# Altium PCB PCB1.PcbDoc
Units mm, origin at the board's own origin, x right, y up, seen from the top; angles counter-clockwise.
Board outline 41.58 x 30 mm, 2 copper layers (Top Layer, Bottom Layer); 19 components, 11 nets, 51 pads, 8 vias.
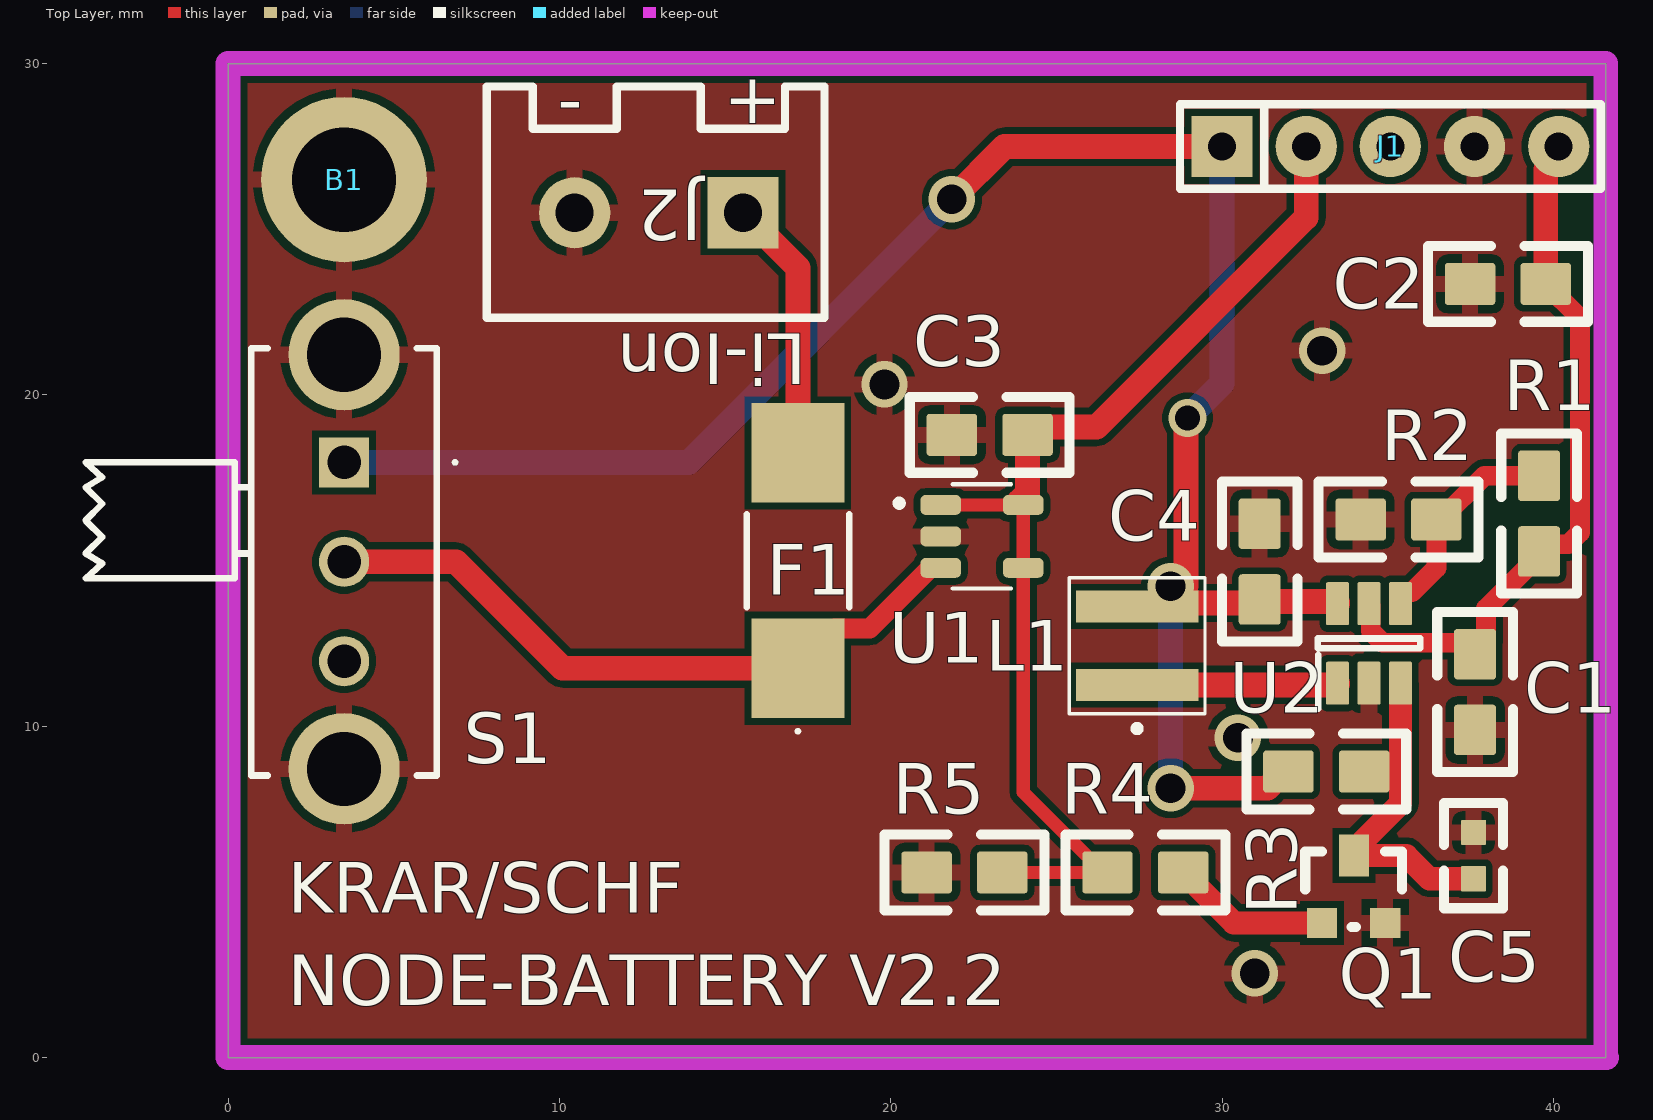
[diagram p0: Top Layer view]
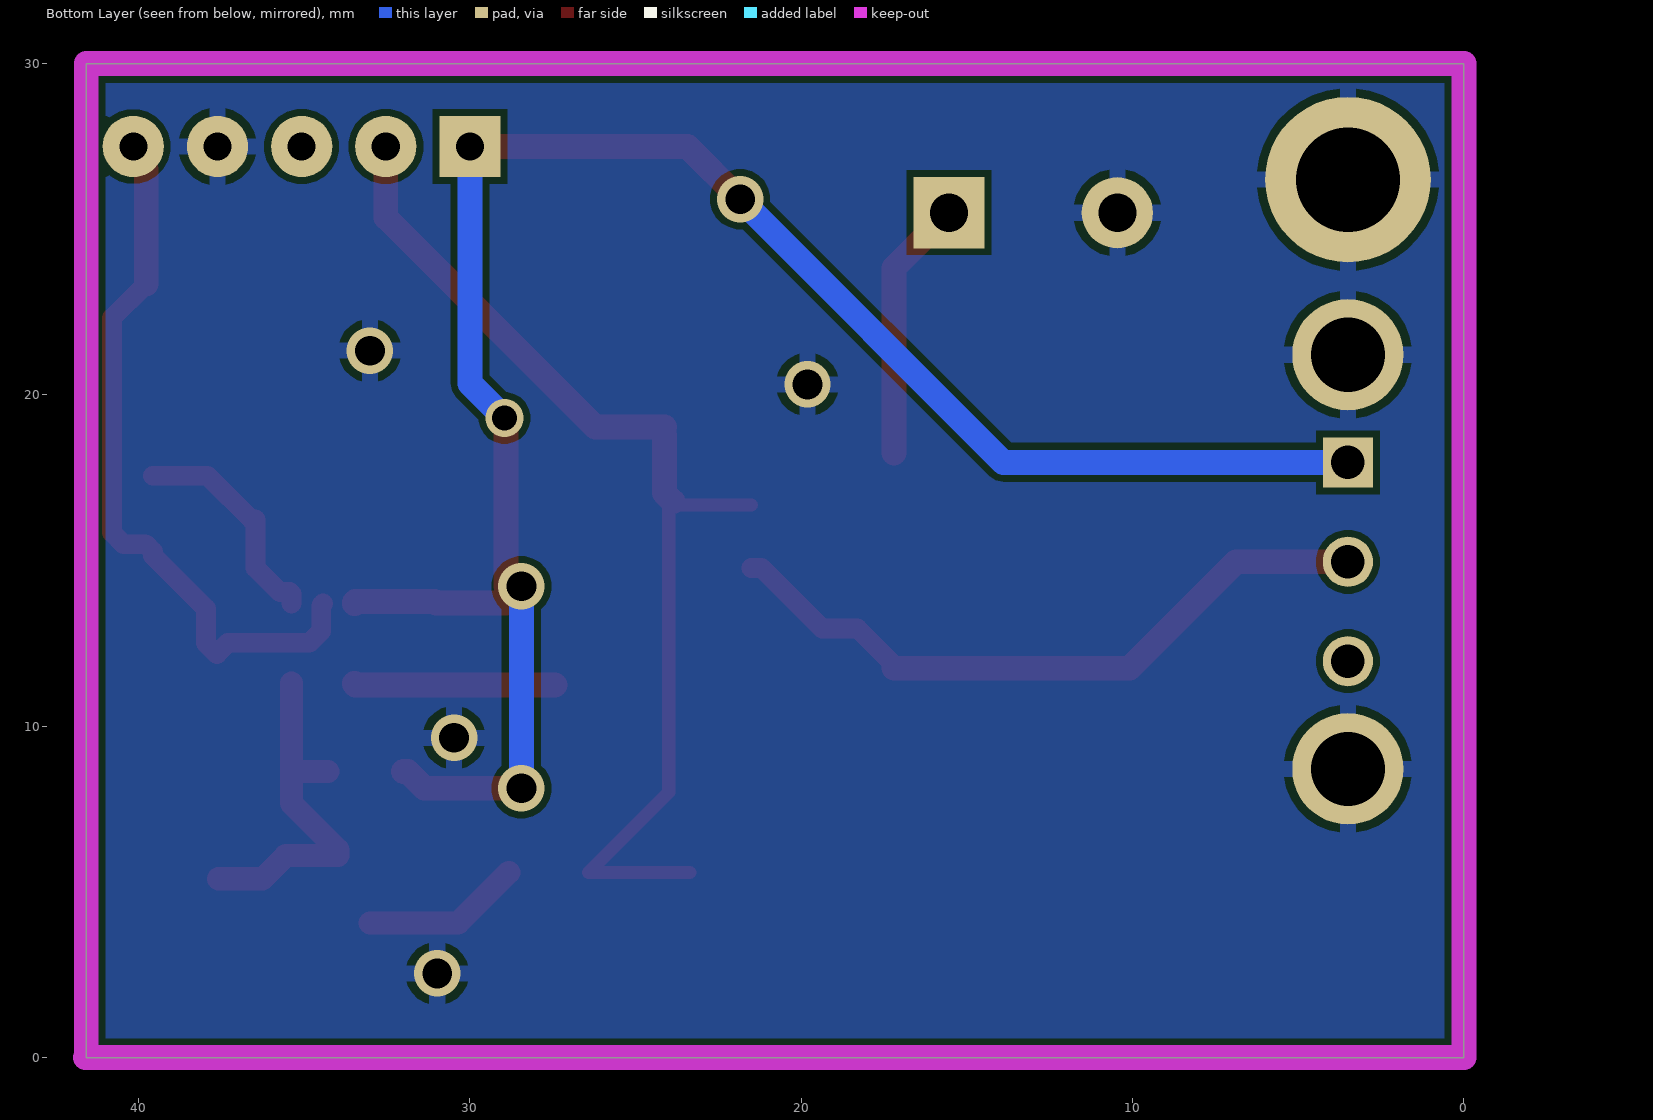
[diagram p1: Bottom Layer view, seen from below]

## Layer stack, top to bottom
Top Solder: solder mask 0.0102, Solder Resist, Dk 3.5
Top Layer: signal copper 0.0356
Dielectric 1: dielectric 0.32, FR-4, Dk 4.8
Bottom Layer: signal copper 0.0356
Bottom Solder: solder mask 0.0102, Solder Resist, Dk 3.5

## Board outline
0,0 41.58,0 41.58,30 0,30

## Design rules (kind name [scope] priority, off if disabled: settings)
Clearance [All] p1: gap=0.2 ignorepadtopadclearanceinfootprint=FALSE except(0.1: Arc-Arc Arc-Track Arc-SMDPad Arc-THPad Arc-Via Arc-Text Arc-Hole Track-Track Track-SMDPad Track-THPad Track-Via Track-Text Track-Hole SMDPad-SMDPad SMDPad-THPad SMDPad-Via SMDPad-Text SMDPad-Hole THPad-THPad THPad-Via THPad-Text THPad-Hole Via-Via Via-Text Via-Hole Text-Text Text-Hole)
HoleSize [All] p1: absolutevalues=TRUE maxlimit=6 minlimit=0.2 maxpercent=80.000 minpercent=20.000
MinimumAnnularRing [All] p1: minimumring=0.2
MinimumSolderMaskSliver [All] p1: minsoldermaskwidth=0
PolygonConnect [All] p1: connectstyle=Relief reliefconductorwidth=0.5 reliefentries=4 polygonreliefangle="90 Angle" airgapwidth=0.25
RoutingVias [All] p1: holewidth=0.85 width=0.85 viastyle="Through Hole" minholewidth=0.75 minwidth=0.2 maxholewidth=0.95 maxwidth=1.95
SilkToSilkClearance [All] p1: silktosilkclearance=0
SilkToSolderMaskClearance [IsPad] p1: minsilkscreentomaskgap=0 clearancetoexposedcopper=TRUE
SolderMaskExpansion [All] p1: expansion=0.102 istentingtop=FALSE
Width [All] p1: maxlimit=6 minlimit=0.2 preferedwidth=0.75
26 further rules are at their usual default settings.

## Components (designator, comment, footprint, x,y, rotation, side; value= is the part's Value field where it differs from the comment)
B1 "Schraube" "B_Schraube-M3 PAD" 3.5,26.5 r0 top
C1 "10µF" C_SMD_0805 37.638,11.033 r270 top
C2 "1µF" C_SMD_0805 38.629,23.352 r180 top
C3 "1µF" C_SMD_0805 22.987,18.796 r180 top
C4 "10µF" C_SMD_0805 31.136,14.97 r90 top
C5 "100nF" C_SMD_0603 37.592,6.096 r90 top
F1 "1A" F_OMF63_Schurtner 17.2,15 r90 top
J1 "BATTERY-COM" SIP-5 35.08,27.5 r0 top
J2 "Batterie | Lithium-Ion" "J_THT_Printklemme 2x" 13,25.5 r180 top
L1 "2,2uH" L_SMD_74438357100 27.437,12.43 r90 top
Q1 "BC846" SOT-23-3_BC846 33.02,4.064 r0 top
R1 "1M" R_SMD_0805 39.569,16.418 r270 top
R2 "100k" R_SMD_0805 35.327,16.24 r0 top
R3 ">100k" R_SMD_0805 33.147,8.636 r0 top
R4 "1k" R_SMD_0805 27.686,5.588 r0 top
R5 "47k" R_SMD_0805 22.225,5.588 r0 top
S1 "S_SLW-1298856-5A-RA-N-D" SLW12988565ARAND 3.5,17.964 r270 top
U1 "U_MCP73811T-420I/OT" SOT95P280X145-5N 22.754,15.732 r0 top
U2 "U_TLV61070ADBVR" SOT23-6 33.488,13.7 r90 top

## Footprints (in the part's own frame and the unit in brackets; to place one, negate y for a bottom-side part, rotate by r counter-clockwise, add the part's x,y. Pads: shape width x height; smd on the part's side, far side on the other; paste and mask are expansions set on the pad)
"B_Schraube-M3 PAD" [mm] "LB-2024-04-18"
  round 5 hole 3.15 unplated: 1(0,0)
C_SMD_0603 [mil] "LB-2024-04-17"
  rrect10% 30x30 smd paste-0.79 mask+1.97: 1(-27.5,0) 2(27.5,0)
  silkscreen extent -62,-35 62,35
C_SMD_0805 [mil] "LB-2024-04-17"
  rrect15% 60x50 smd paste-0.79 mask+1.97: 1(-45,0) 2(45,0)
  silkscreen extent -95,-45 95,45
F_OMF63_Schurtner [mm]
  rect 3x2.8 smd: 1(-3.25,0) 2(3.25,0)
  silkscreen extent -5.2,-1.55 1.4,1.55
"J_THT_Printklemme 2x" [mm] "LB-2024-04-17"
  rect 2.15x2.15 hole 1.15: 1(-2.54,0)
  round 2.15 hole 1.15: 2(2.54,0)
  silkscreen extent -5,-3.81 5.19,3.18
L_SMD_74438357100 [mm]
  rect 0.97x3.7 smd: 1(-1.18,0) 2(1.18,0)
  silkscreen extent -2.6,-2.05 2.05,2.05
R_SMD_0805 [mil] "LB-2024-04-17"
  rrect15% 60x50 smd paste-0.79 mask+1.97: 1(-45,0) 2(45,0)
  silkscreen extent -95,-45 95,45
SIP-5 [mm] "LB-2024-04-17"
  rect 1.85x1.85 hole 0.85: 1(-5.08,0)
  round 1.85 hole 0.85: 2(-2.54,0) 3(0,0) 4(2.54,0) 5(5.08,0)
  silkscreen extent -6.35,-1.27 6.35,1.27
SLW12988565ARAND [mm]
  rect 1.515x1.515 hole 1.01: 1(0,0)
  round 1.515 hole 1.01: 2(3,0) 3(6,0)
  round 3.36 hole 2.24: 4(-3.25,0) 5(9.25,0)
  silkscreen extent -3.45,-7.8 9.45,3.4
SOT23-6 [mm] "LB-2024-04-25"
  rrect15% 1.3x0.7 smd paste-0.02 mask+0.05: 1(-2.4,0) 2(-2.4,-0.95) 3(-2.4,-1.9) 4(0,-1.9) 5(0,-0.95) 6(0,0)
  silkscreen extent -3.17,-2.5 -1.05,0.6
SOT95P280X145-5N [mm]
  rrect50% 1.22x0.6 smd: 1(-1.245,0.95) 2(-1.245,0) 3(-1.245,-0.95) 4(1.245,-0.95) 5(1.245,0.95)
  silkscreen extent -2.6,-1.57 0.88,1.57, body extent -1.45,-1.35 1.45,1.35, height 1.45
SOT-23-3_BC846 [mil] "SMD Footprint für BC846"
  rect 36x36 smd: B(0,0) E(75,0)
  rect 36x50 smd: C(38,80)
  silkscreen extent -20,-5 95,85

## Part data
B1: library part B_Schraube, "Schraubenloch für M3 Schrauben"
C1 C2 C3 C4 C5: library part C_SMD_KO, "Kondensator SMD Universal, Keramik, Folie, usw."
F1: library part F_THT_Fuse, "Sicherung"
J1: library part J_THT_CON5, "Stecker"
J2: library part J_THT_CON2, "Stecker"
L1: library part L_SMD_Spule, "Spule SMD"
Q1: library part Q_SMD_NPN, "NPN Transistor"
R1 R2 R3 R4 R5: library part R_SMD_Widerstand, "Widerstand SMD"
S1: "Switch", Manufacturer_Name="Same Sky", Manufacturer_Part_Number=SLW-1298856-5A-RA-N-D, Datasheet Link=https://www.sameskydevices.com/product/resource/slw-1298856-5a-ra-n-d.pdf, Height=6.3mm
U1: "Charger IC Lithium Ion/Polymer SOT-23-5", Package="SOT-23 Microchip", Availability="In Stock", Check_prices=https://www.snapeda.com/parts/MCP73811T-420I/OT/Microchip/view-part/?ref=eda, MF=Microchip, MP=MCP73811T-420I/OT, Price=None, Purchase-URL=https://pricing.snapeda.com/search/part/MCP73811T-420I/OT/?ref=eda, SnapEDA_Link=https://www.snapeda.com/parts/MCP73811T-420I/OT/Microchip/view-part/?ref=snap
U2: "Integrated Circuit, Boost converter: Input 0.5 - 5.5V  / Output 2.2 - 5.5V", Arrow Part Number=TLV61070ADBVR, Manufacturer_Name="Texas Instruments", Mouser Part Number=595-TLV61070ADBVR, Arrow Price/Stock=https://www.arrow.com/en/products/tlv61070adbvr/texas-instruments?region=europe, Datasheet Link=https://www.ti.com/lit/ds/symlink/tlv61070a.pdf?HQS=dis-mous-null-mousermode-dsf-pf-null-wwe&ts=1668211309833&ref_url=https%253A%252F%252Fwww.mouser.com%252F, Height=1.45mm, Manufacturer_Part_Number=TLV61070ADBVR, Mouser Price/Stock=https://www.mouser.co.uk/ProductDetail/Texas-Instruments/TLV61070ADBVR?qs=T%252BzbugeAwjhLlT1empixsw%3D%3D

## Via types
v1: diameter 1.4, hole 0.9, Top Layer to Bottom Layer, 7 vias
v2: diameter 1.15, hole 0.75, Top Layer to Bottom Layer, 1 vias

## Nets (pads, with @x,y where several pads share a name; then routed paths per layer and width w, separated by ;. In a path a pad name is that pad's centre, name@x,y a point inside that pad or via, vN(x,y) a via of type N, cw(c..) or ccw(c..) an arc to the next point about the centre after c; other vN are vias at no path point)
3,3V: J1.3
5V: C1.1 C2.1 J1.5 R1.2 U2.5 | length 21.9
  Top Layer w0.6: U2.5 34.488,13.65 34.488,12.874 34.84,12.522 37.303,12.522 37.638,12.187 C1.1 37.973,12.511 37.973,13.552 39.569,15.148 R1.2 39.788,15.494 40.454,15.494 40.805,15.845 40.805,22.319 C2.1
  Top Layer w0.75: C2.1 39.772,26.815 40.16,27.202 J1.5
GND: B1.1 C1.2 C2.2 C3.2 C4.2 C5.2 J1.4 J2.2 Q1.E R2.1 R5.1 S1.4 S1.5 U1.2 U2.2
  other v1: 30.988,2.54 30.48,9.652 19.812,20.32 33.02,21.336
NetC5_1: C5.1 Q1.C R3.2 U2.3 | length 10.8
  Top Layer w0.7: R3.2 35.388,8.636 ; U2.3 35.388,8.636 ; C5.1 36.258,5.398 35.56,6.096 Q1.C 33.985,6.274 35.388,7.677 35.388,8.636
NetF1_2: F1.2 J2.1 | length 8.6
  Top Layer w0.5: J2.1 J2.1@16.04,26
  Top Layer w0.75: J2.1 17.2,23.84 F1.2
NetL1_1: L1.1 U2.1 | length 6.1
  Top Layer w0.75: L1.1 33.463,11.25 33.488,11.275 U2.1
NetQ1_B: Q1.B R4.2 | length 4.8
  Top Layer w0.7: R4.2 30.353,4.064 Q1.B
NetR1_1: R1.1 R2.2 U2.4 | length 6.8
  Top Layer w0.6: U2.4 35.388,14 35.438,14.05 35.738,14.05 36.47,14.782 R2.2 36.597,16.24 37.918,17.561 R1.1
VBAT: F1.1 S1.2 U1.3 | length 20.7
  Top Layer w0.6: F1.1 17.2,11.85 18.3,12.95 19.367,12.95 21.199,14.782 U1.3
  Top Layer w0.75: S1.2 6.88,14.964 10.094,11.75 F1.1
VBAT_M: C4.1 J1.1 L1.2 R3.1 S1.1 U2.6 | length 59.1
  Top Layer w0.75: v1(21.844,25.908) 23.436,27.5 J1.1 ; v1(28.448,8.128) 31.369,8.128 31.877,8.636 R3.1 ; v1(28.448,14.224) 28.912,14.224 28.912,19.26 v2(28.956,19.304) ; L1.2@28.912,13.719 31.028,13.719 31.073,13.764 33.463,13.764 33.488,13.739 U2.6
  Bottom Layer w0.75: S1.1 13.9,17.964 v1(21.844,25.908) ; v1(28.448,8.128) v1(28.448,14.224) ; v2(28.956,19.304) 30,20.348 J1.1
VBUS: C3.1 J1.2 R4.1 R5.2 U1.1 U1.4 U1.5 | length 33.1
  Top Layer w0.4: U1.1 U1.5@23.976,16.682 ; R5.2 26.416,5.588 23.999,8.005 U1.4 U1.5 U1.5@23.976,16.682 ; U1.5@23.876,16.782 U1.5@23.976,16.682
  Top Layer w0.75: U1.5@23.876,16.782 24.13,17.036 C3.1 ; C3.1@24.13,19.034 26.215,19.034 32.54,25.359 J1.2
pads on no net: S1.3

## Polygon pours and split planes (outlines as drawn)
GND on Bottom Layer "Bottom Layer-No Net" (solid, remove dead copper, pour order 1): -15.621,33.02 -17.145,34.544 -17.145,37.084 70.231,37.084 75.184,32.131 70.104,27.051 70.104,-3.556 -12.7,-3.556 -16.891,-7.747
GND on Top Layer "Bottom Layer-No Net" (solid, remove dead copper, pour order 0): -19.132,33.444 -19.132,-3.556 65.868,-3.556 64.868,-2.556 64.868,35.444 -17.132,35.444

## Keep-outs
Keep-Out Layer:
  lines w0.75: 41.58,0 41.58,7.5 41.58,22.5 41.58,30 0,30 0,0 41.6,0

## Silkscreen, mask and mechanical layers (free items; w line width, h text height)
Top Overlay:
  text "-" at 9.954,28.192 h1.52
  text "+" at 14.954,28.2 h1.52
  text "Li-Ion" at 17.446,21.846 h1.52 r180
  text "KRAR/SCHF" at 1.8,4.376 h1.52
  text "NODE-BATTERY V2.2" at 1.8,1.582 h1.52